# EAGLE board attiny_bo (EAGLE 6.2)
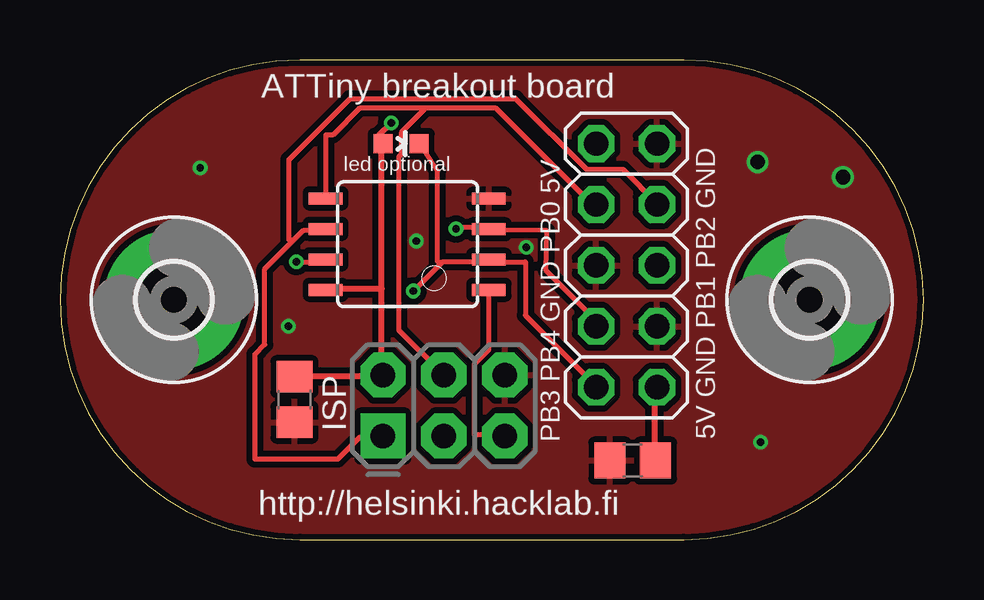
[diagram p0: board, top side]
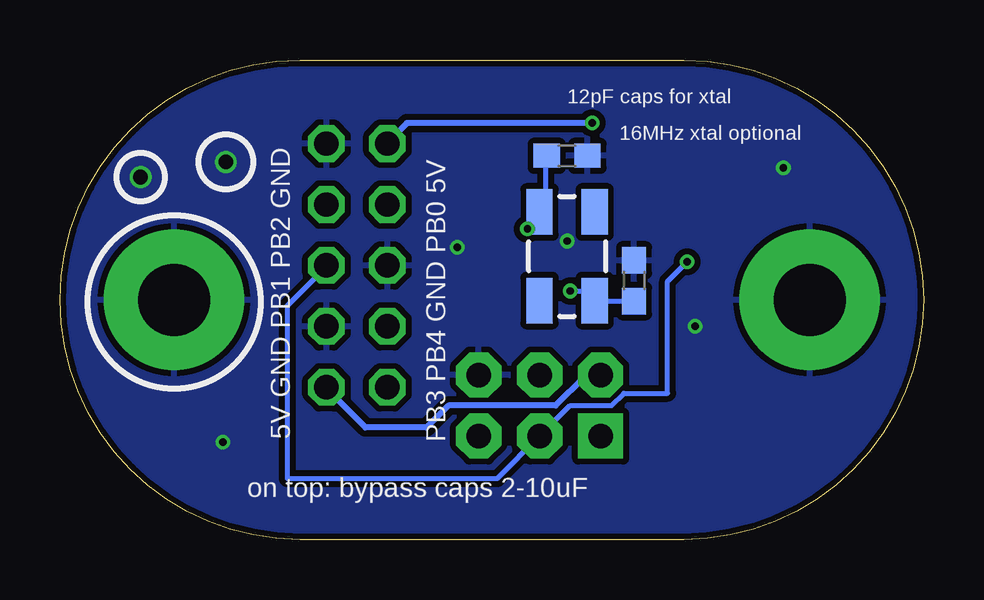
[diagram p1: board, bottom side, seen from below]

Size 36 x 20 mm. Coordinates in mm from the lower left corner, seen from the top.
Outline: 10,20 arc180 10,0 26,0 arc180 26,20 10,20
Copper layers (1*16): Top 0.035mm / dielectric 1.5mm / Bottom 0.035mm
Design rules: minimum track width 8mil, minimum drill 12mil, track to track 6mil, track to pad 6mil, pad to pad 6mil, via to via 6mil, smd to smd 0mil, copper to edge 10mil, drill to drill 10mil, minimum pad ring 10mil, minimum via ring 6mil, stop-mask expansion 2mil, vias tented up to drill 100mil, thermal gap 10mil
Net classes: 1 POWER: width 0.254 mm

## Footprints (pad centres in the part's own frame; a part is rotated, then mirrored left to right if it is on the bottom)
C0805 = smd 1.3 x 1.5: 1 -0.95,0; 2 0.95,0
C0603 = smd 1.1 x 1: 1 -0.85,0; 2 0.85,0
3,0-PAD = drill 3 pad 5.842: B3,0 0,0
8S2 = smd 0.5 x 1.4: 1 -1.905,-3.404; 2 -0.645,-3.404; 3 0.625,-3.404; 4 1.895,-3.404; 5 1.905,3.404; 6 0.635,3.404; 7 -0.635,3.404; 8 -1.905,3.404
2X3-NS = drill 1.016 pad 1.88 square: 1 -2.54,-1.27 | drill 1.016 pad 1.88 octagon: 2 -2.54,1.27; 3 0,-1.27; 4 0,1.27; 5 2.54,-1.27; 6 2.54,1.27
2X05 = drill 1.016 octagon: 1 -5.08,-1.27; 2 -5.08,1.27; 3 -2.54,-1.27; 4 -2.54,1.27; 5 0,-1.27; 6 0,1.27; 7 2.54,-1.27; 8 2.54,1.27; 9 5.08,-1.27; 10 5.08,1.27
LED-0603 = smd 0.8 x 0.8: A 0,-0.75; C 0,0.75
CRYSTAL-SMD-5X3 = smd 1.9 x 1.1: 1 -1.85,-1.15; 2 1.85,-1.15; 3 1.85,1.15; 4 -1.85,1.15

## Placement (x,y rotation side)
C1  [C0805]  9.78,5.84 270 top
C2  [C0805]  23.88,3.3 180 top
CX0  22pF  [C0603]  14.86,16 180 bottom
CX1  22pF  [C0603]  12.06,10.79 270 bottom
H1  MOUNT-PAD-ROUND3.0  [3,0-PAD]  4.75,10 0 top
H2  MOUNT-PAD-ROUND3.0  [3,0-PAD]  31.25,10 0 top
IC1  ATTiny85  [8S2]  14.48,12.32 90 top
J1  AVR_SPI_PRG_6NS  [2X3-NS]  16,5.59 0 top
JP1  [2X05]  23.62,11.43 270 top
LED1  [LED-0603]  14.22,16.51 270 top
Y1  16MHz  [CRYSTAL-SMD-5X3]  14.86,11.81 90 bottom

## Library data of the parts
C1 C2 CX0 CX1 = rcl
H1 H2 = holes
IC1 = atmel; MPN: ATTINY13-20SU; OC_FARNELL: 9171568; OC_NEWARK: 96K6522
J1 = SparkFun-Connectors
JP1 = pinhead
LED1 = SparkFun-LED
Y1 = SparkFun-FreqCtrl

## Nets
+5V [POWER]: C1.1 C2.1 IC1.8 J1.2 JP1.1 JP1.10 LED1.A
GND [POWER]: C1.2 C2.2 CX0.1 CX1.1 H1.B3,0 H2.B3,0 IC1.4 J1.6 JP1.2 JP1.5 JP1.8
PB0: IC1.5 J1.4 JP1.3
PB1: IC1.6 J1.1 JP1.4
PB2: IC1.7 J1.3 JP1.6
PB3: CX1.2 IC1.2 JP1.9 LED1.C Y1.1
PB4: CX0.2 IC1.3 JP1.7 Y1.3
PB5: IC1.1 J1.5

## Tracks (layer width: path | path; a pad name or v marks a point on that pad's centre or on a via)
+5V  (via drill 0.3)
  Top 0.254: 13.41,10.46 13.41,16.46 LED1.A 13.41,16.56 13.31,16.56 13.31,16.87 v13.82,17.37 | 13.41,10.46 11.07,10.46 IC1.8 | C2.1 24.79,3.35 24.79,6.3 24.89,6.3 JP1.10 | C1.1 9.86,6.81 13.41,6.81 J1.2 13.41,6.91 13.41,10.46
  Bottom 0.254: v13.82,17.37 21.54,17.37 22.35,16.56 JP1.1 | JP1.10 24.89,6.3 23.27,4.67 20.73,4.67 19.81,5.59 15.34,5.59 14.12,6.81 13.51,6.81 J1.2
GND  (via drill 0.3, 0.61)
  other vias: 32.64,15.11 5.84,15.49 29.21,4.06 29.08,15.75 9.53,8.89 19.43,12.19 14.86,12.45
  pour Top (isolate 0.254): 0,19.94 0,0 35.81,0 35.81,19.94
  pour Bottom (isolate 0.254): 0,19.94 0,0 35.81,0 35.81,19.94
PB0
  Top 0.203: IC1.5 11.07,16.87 11.38,16.87 12.5,17.98 15.24,17.98 | 15.24,17.98 18.19,17.98 22.15,14.02 22.35,14.02 JP1.3 | IC1.5 | J1.4 14.12,8.74 14.12,15.95 14.22,16.05 14.22,16.97 15.24,17.98
PB1
  Top 0.203: 9.7,12.45 8.53,11.28 8.53,8.13 8.13,7.72 8.13,3.35 11.58,3.35 12.5,4.27 13.41,4.27 J1.1 | 9.7,12.45 10.16,12.9 10.97,12.9 IC1.6 | JP1.4 24.89,14.02 23.47,15.44 21.95,15.44 19,18.39 12.09,18.39 9.55,15.85 9.55,12.5 9.65,12.5 9.7,12.45
PB2  (via drill 0.3)
  Top 0.203: v9.86,11.58 10.87,11.58 10.97,11.68 IC1.7
  Bottom 0.203: v9.86,11.58 10.67,10.77 10.67,6.1 12.5,6.1 13.01,5.59 14.73,5.59 J1.3 17.78,2.54 26.52,2.54 26.52,9.75 24.89,11.38 JP1.6
PB3  (via drill 0.3)
  Top 0.203: 15.95,11.58 17.88,11.58 IC1.2 17.98,11.58 19.41,11.58 19.41,9.35 22.35,6.4 JP1.9 | LED1.C 15.04,16.46 15.75,15.37 15.75,11.58 15.95,11.58 | 15.95,11.58 v14.73,10.36
  Bottom 0.203: CX1.2 12.09,9.96 13.61,9.96 Y1.1 13.72,10.06 14.02,10.36 v14.73,10.36
PB4  (via drill 0.3)
  Top 0.203: v16.51,12.95 16.56,13.01 17.88,13.01 IC1.3 17.98,12.9 20.3,12.88 20.27,11.23 22.35,9.14 JP1.7
  Bottom 0.203: 15.75,13.72 15.75,15.95 CX0.2 | 15.75,13.72 15.95,13.72 Y1.3 15.75,13.72 | 15.75,13.72 v16.51,12.95
PB5
  Top 0.203: IC1.1 17.88,10.36 17.88,7.92 17.27,7.32 17.27,4.37 18.49,4.37 J1.5

## Text on the board
tNames: ATTiny breakout board | led optional | ISP | PB3 PB4 GND PB0 5V | 5V GND PB1 PB2 GND | http://helsinki.hacklab.fi
bNames: 12pF caps for xtal | 16MHz xtal optional | PB3 PB4 GND PB0 5V | 5V GND PB1 PB2 GND | on top: bypass caps 2-10uF